# Altium PCB SMPSBreakout.PcbDoc
Units mm, origin at the board's own origin, x right, y up, seen from the top; angles counter-clockwise.
Board outline 60 x 60 mm, 2 copper layers (Top Layer, Bottom Layer); 56 components, 28 nets, 199 pads, 351 vias.
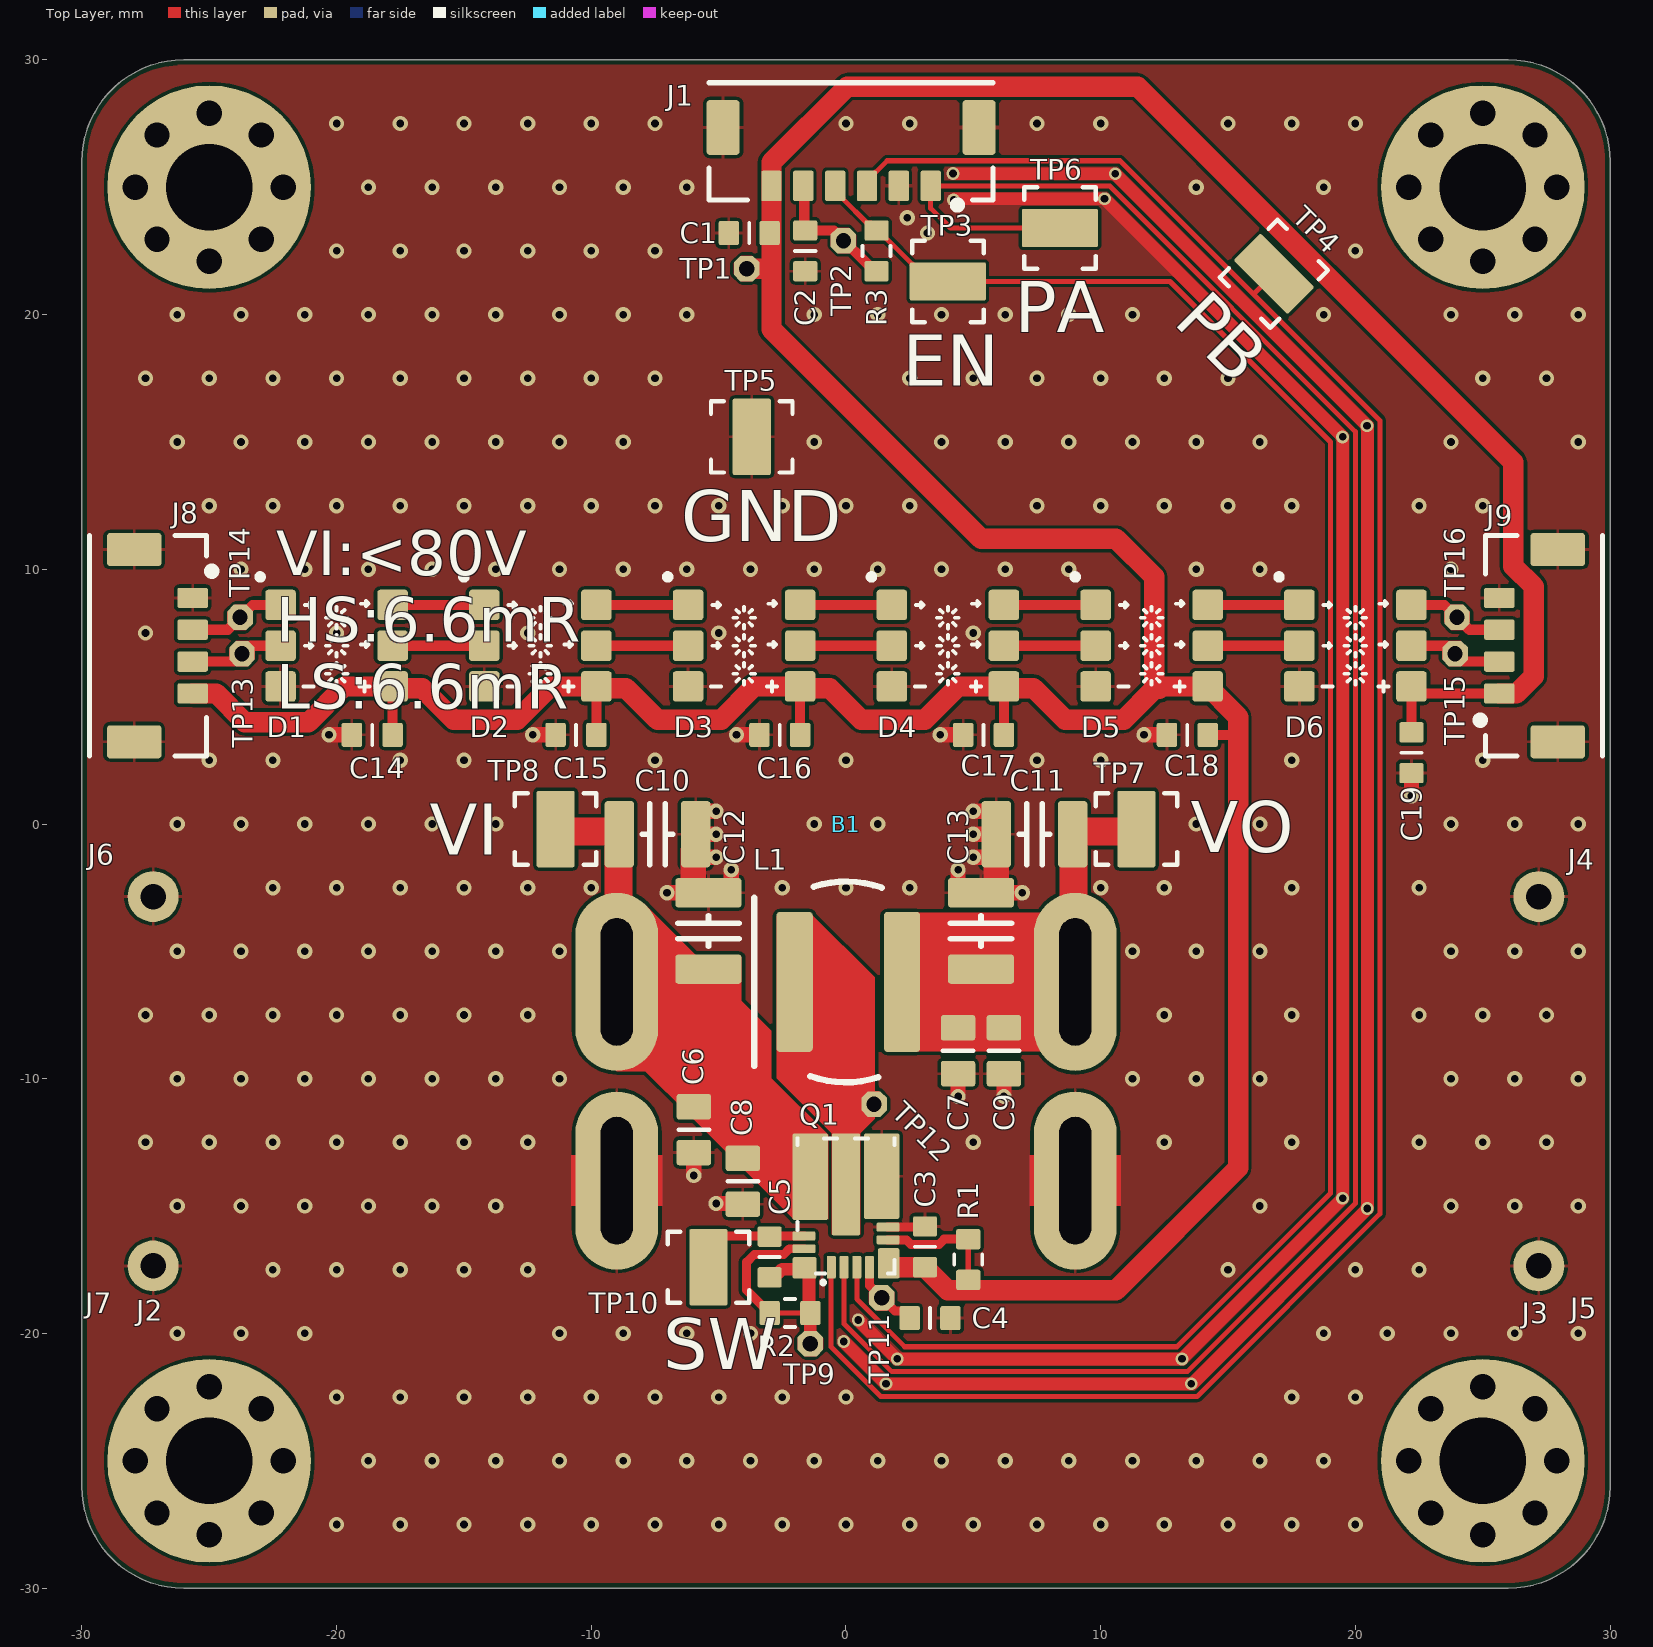
[diagram p0: Top Layer view]
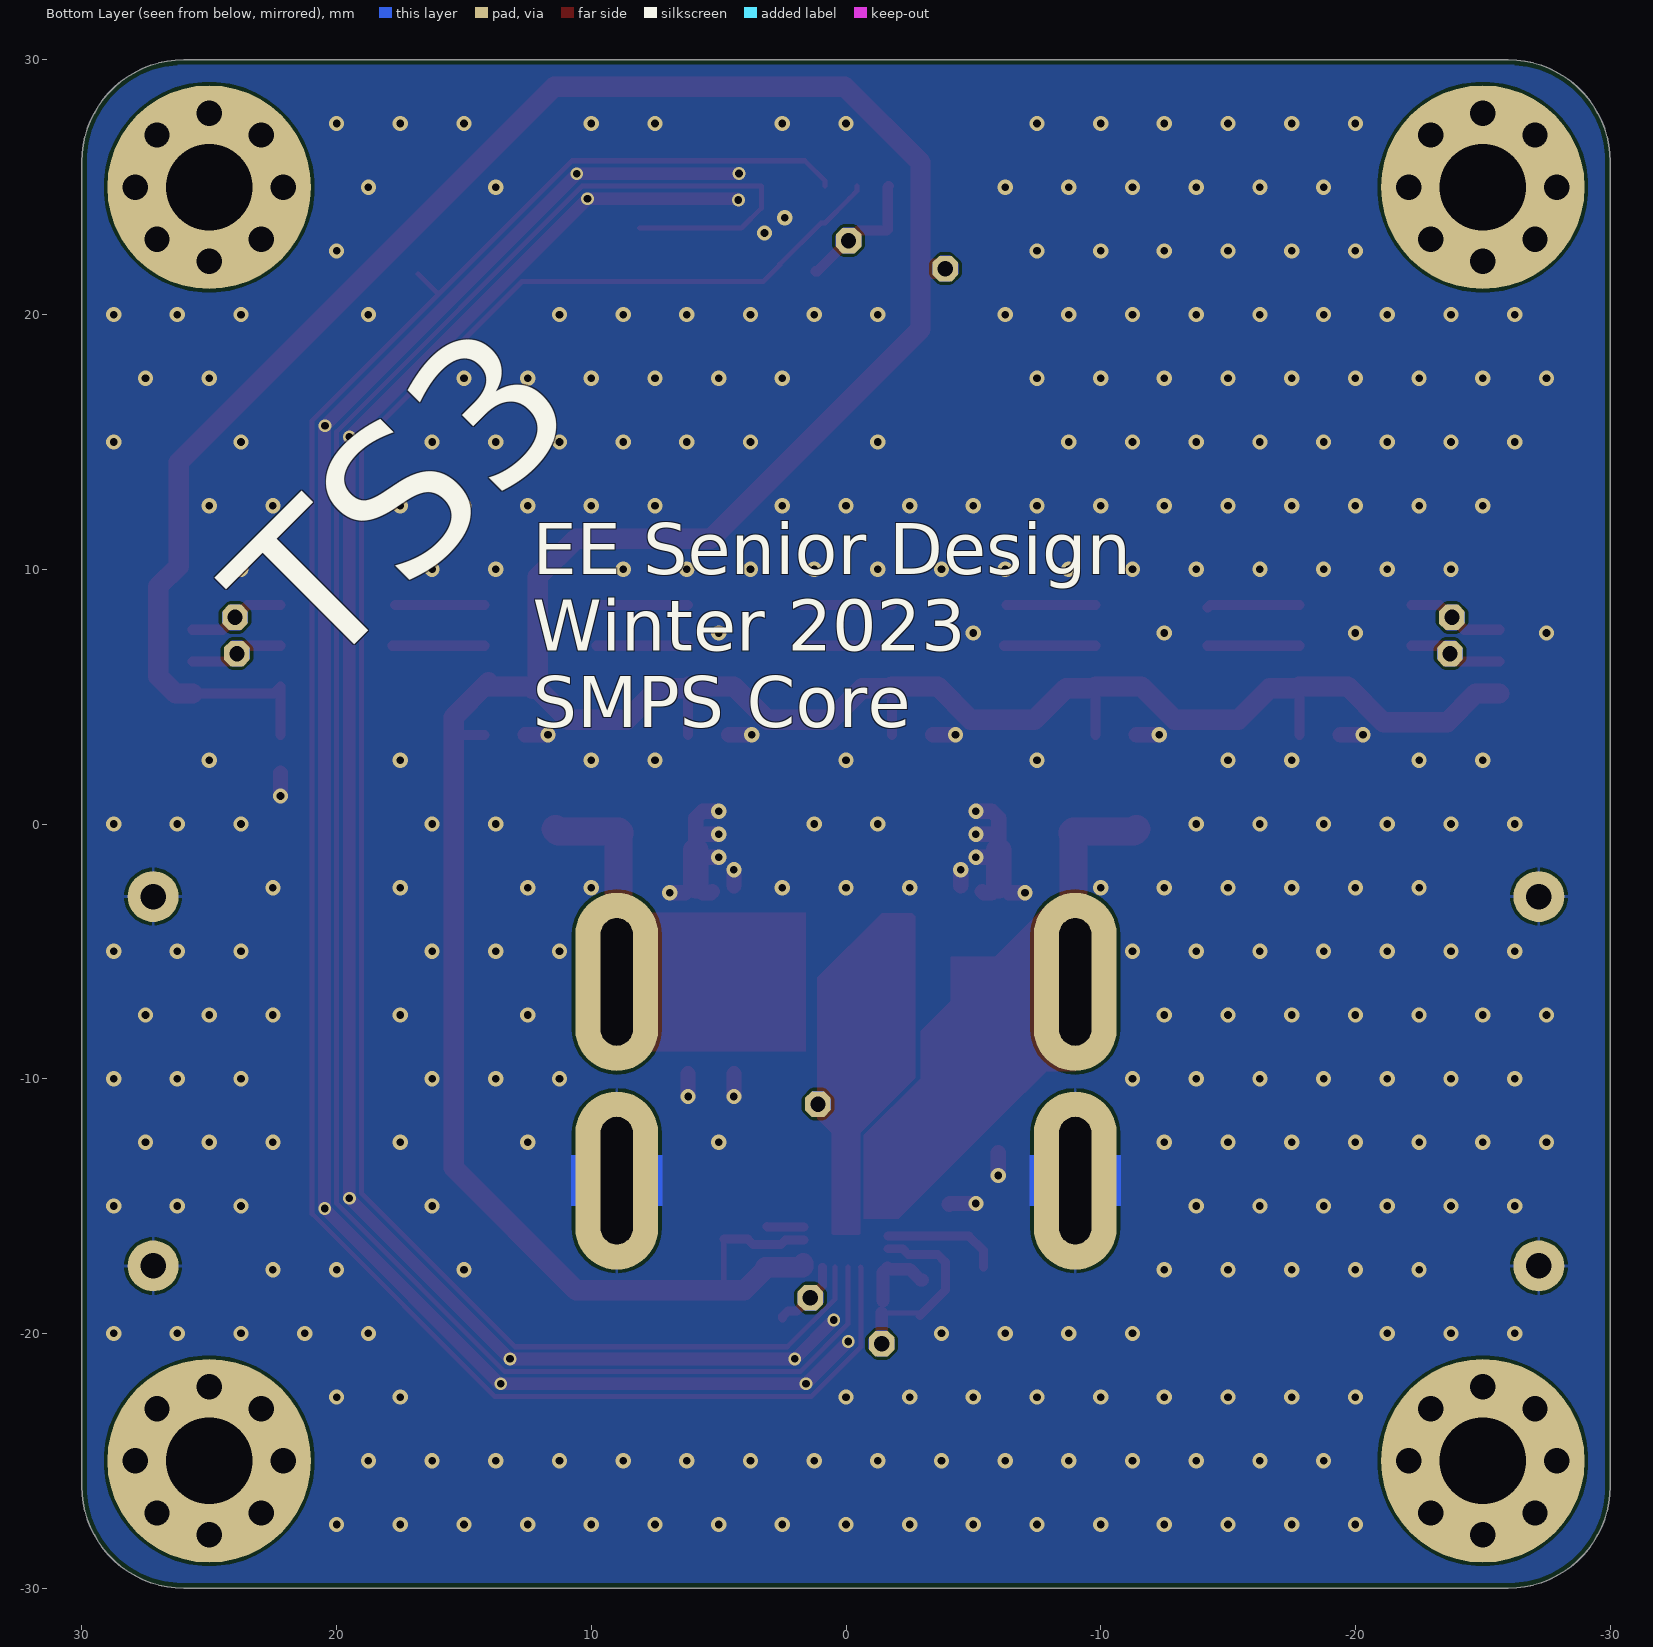
[diagram p1: Bottom Layer view, seen from below]
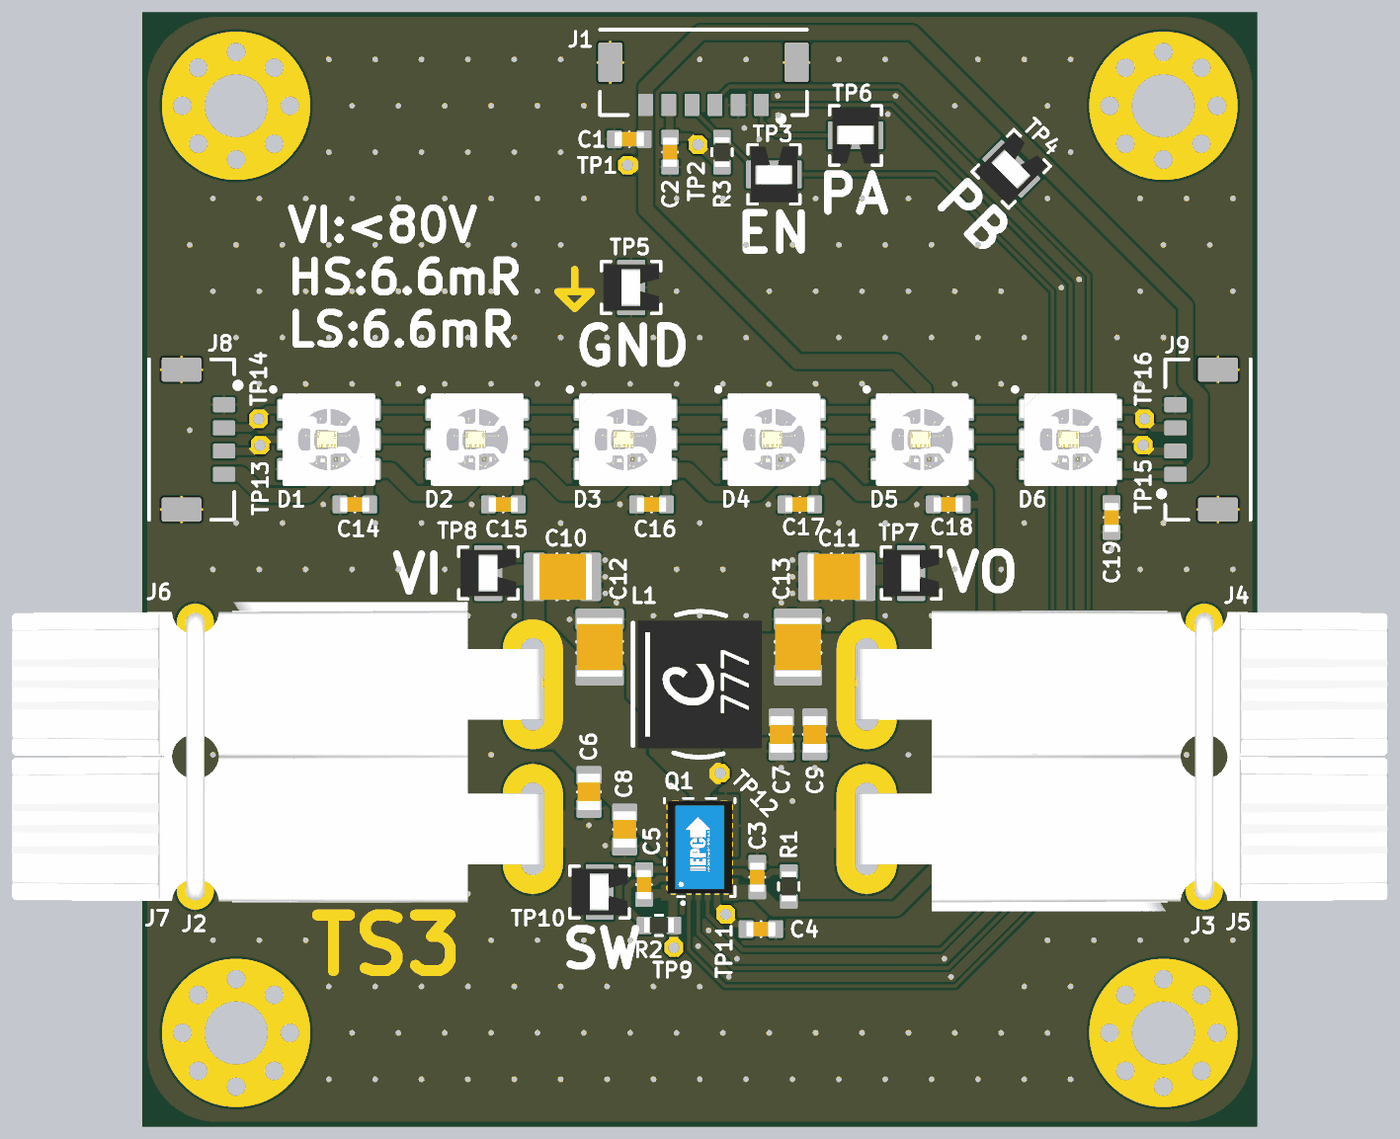
[diagram p2: 3D render of the assembled board from above, using the file's embedded part models]

## Layer stack, top to bottom
Top Solder: solder mask 0.0102, Solder Resist, Dk 3.5
Top Layer: signal copper 0.0356
Dielectric 1: dielectric 0.32, FR-4, Dk 4.8
Bottom Layer: signal copper 0.0356
Bottom Solder: solder mask 0.0102, Solder Resist, Dk 3.5

## Board outline
-26,-30 cw(c-26,-26) -30,-26 -30,26 cw(c-26,26) -26,30 26,30 cw(c26,26) 30,26 30,-26 cw(c26,-26) 26,-30

## Design rules (kind name [scope] priority, off if disabled: settings)
BoardOutlineClearance [All] p1: gap=0.2 ignorepadtopadclearanceinfootprint=FALSE
Clearance [All] p1: gap=0.127 ignorepadtopadclearanceinfootprint=FALSE except(0.25: Arc-Hole Track-Hole SMDPad-Hole THPad-Hole Via-Hole Fill-Hole Poly-Hole Region-Hole Text-Hole)
ComponentClearance [NOT InComponent('B1') vs NOT InComponent('B1')] p1: gap=0.127 collisioncheckmode=3 verticalgap=0.127 showdistances=TRUE
DiffPairsRouting [All] p1: maxlimit=0.254 minlimit=0.127 mostfreqgap=0.127 toplayer_minwidth=0.127 toplayer_maxwidth=25.4 toplayer_prefwidth=0.127 bottomlayer_minwidth=0.127 bottomlayer_maxwidth=25.4 bottomlayer_prefwidth=0.127 maxuncoupledlength=12.7
DiffPairsRouting DiffPairsRouting_USB [InDifferentialPair('USBD')] p2: maxlimit=0.2 minlimit=0.2 mostfreqgap=0.2 toplayer_minwidth=0.766 toplayer_maxwidth=0.766 toplayer_prefwidth=0.766 bottomlayer_minwidth=0.766 bottomlayer_maxwidth=0.766 bottomlayer_prefwidth=0.766 impedanceprofiledriven=TRUE impedanceprofileid={7DB69605-737D-4C2B-A8A7-E868D9FD1BFF} maxuncoupledlength=12.7
Height [All] p1: minheight=0 maxheight=1816.048 prefheight=12.7
HoleSize [All] p1: absolutevalues=TRUE maxlimit=6.3 minlimit=0.3 maxpercent=80.000 minpercent=20.000
HoleToHoleClearance [All] p1: gap=0.25 allowstackedmicrovias=FALSE
MinimumAnnularRing [All] p1: minimumring=0.15
MinimumSolderMaskSliver [All] p1: minsoldermaskwidth=0
PlaneClearance [All] p1: clearance=0.127
PlaneConnect PlaneConnectPowerPads [InPadClass('PowerPads')] p1: planeconnectstyle=Direct reliefexpansion=0.508 reliefentries=4 reliefconductorwidth=0.254 reliefairgap=0.254
PlaneConnect [All] p2: pad.planeconnectstyle=Relief pad.reliefexpansion=0.3 pad.reliefentries=4 pad.reliefconductorwidth=0.127 pad.reliefairgap=0.127 via.planeconnectstyle=Direct via.reliefexpansion=0.3 via.reliefentries=4 via.reliefconductorwidth=0.127 via.reliefairgap=0.127
PolygonConnect PolygonConnectPowerPads [All vs (InPadClass('PowerPads'))] p1: connectstyle=Direct reliefconductorwidth=0.254 reliefentries=4 polygonreliefangle="90 Angle" airgapwidth=0.254
PolygonConnect [All] p2: thpad.connectstyle=Relief thpad.reliefconductorwidth=0.127 thpad.reliefentries=4 thpad.polygonreliefangle="90 Angle" thpad.airgapwidth=0.127 smdpad.connectstyle=Relief smdpad.reliefconductorwidth=0.127 smdpad.reliefentries=4 smdpad.polygonreliefangle="90 Angle" smdpad.airgapwidth=0.127 via.connectstyle=Direct via.reliefconductorwidth=0.127 via.reliefentries=4 via.polygonreliefangle="90 Angle" via.airgapwidth=0.127
RoutingVias [All] p1: holewidth=0.3 width=0.5 viastyle="Through Hole" minholewidth=0.3 minwidth=0.5 maxholewidth=0.6 maxwidth=6.6
SilkToSilkClearance [All] p1: silktosilkclearance=0
SilkToSolderMaskClearance [IsPad] p1: minsilkscreentomaskgap=0.127 clearancetoexposedcopper=TRUE
SolderMaskExpansion SolderMaskExpansion_Via [IsVia] p1: expansion=0.075 istentingtop=TRUE
SolderMaskExpansion [NOT IsVia] p2: expansion=0.075 istentingtop=FALSE
Width [All] p1: maxlimit=25.4 minlimit=0.127 preferedwidth=0.127 minimp=50.000000 maximp=50.000000 favimp=50.000000
20 further rules are at their usual default settings.

## Components (designator, comment, footprint, x,y, rotation, side; value= is the part's Value field where it differs from the comment)
B1 "Board Outline Square" PCB_OUTLINE_SQUARE 0,0 r0 top locked
C1 "Capacitor - Ceramic - Generic" CAPACITOR_0603(1608)_GENERIC -3.8,23.2 r180 top value=1uF
C2 "Capacitor - Ceramic - Generic" CAPACITOR_0603(1608)_GENERIC -1.6,22.5 r270 top value=1uF
C3 "Capacitor - Ceramic - Generic" CAPACITOR_0603(1608)_GENERIC 3.1,-16.6 r90 top value=100nF
C4 "Capacitor - Ceramic - Generic" CAPACITOR_0603(1608)_GENERIC 3.3,-19.4 r180 top value=100nF
C5 "Capacitor - Ceramic - Generic" CAPACITOR_0603(1608)_GENERIC -3,-17 r270 top value=100nF
C6 "Capacitor - Ceramic - Generic" CAPACITOR_0805(2012)_GENERIC -5.975,-12 r270 top value=1uF
C7 "Capacitor - Ceramic - Generic" CAPACITOR_0805(2012)_GENERIC 4.4,-8.9 r270 top value=1uF
C8 "Capacitor - Ceramic - Generic" CAPACITOR_0805(2012)_GENERIC -4.05,-14.025 r270 top value=1uF
C9 "Capacitor - Ceramic - Generic" CAPACITOR_0805(2012)_GENERIC 6.2,-8.9 r270 top value=1uF
C10 "Capacitor - Ceramic - Generic" CAPACITOR_1210(3225)_GENERIC -7.4,-0.4 r0 top value=10uF
C11 "Capacitor - Ceramic - Generic" CAPACITOR_1210(3225)_GENERIC 7.4,-0.4 r180 top value=10uF
C12 "Capacitor - Ceramic - Generic" CAPACITOR_1210(3225)_GENERIC -5.4,-4.2 r90 top value=10uF
C13 "Capacitor - Ceramic - Generic" CAPACITOR_1210(3225)_GENERIC 5.3,-4.2 r90 top value=10uF
C14 "Capacitor - Ceramic - Generic" CAPACITOR_0603(1608)_GENERIC -18.6,3.5 r180 top value=100nF
C15 "Capacitor - Ceramic - Generic" CAPACITOR_0603(1608)_GENERIC -10.6,3.5 r180 top value=100nF
C16 "Capacitor - Ceramic - Generic" CAPACITOR_0603(1608)_GENERIC -2.6,3.5 r180 top value=100nF
C17 "Capacitor - Ceramic - Generic" CAPACITOR_0603(1608)_GENERIC 5.4,3.5 r180 top value=100nF
C18 "Capacitor - Ceramic - Generic" CAPACITOR_0603(1608)_GENERIC 13.4,3.5 r180 top value=100nF
C19 "Capacitor - Ceramic - Generic" CAPACITOR_0603(1608)_GENERIC 22.2,2.8 r270 top value=100nF
D1 "APA102C" 5X5MM(6PIN)_JLEAD_GENERIC -20,7 r0 top
D2 "APA102C" 5X5MM(6PIN)_JLEAD_GENERIC -12,7 r0 top
D3 "APA102C" 5X5MM(6PIN)_JLEAD_GENERIC -4,7 r0 top
D4 "APA102C" 5X5MM(6PIN)_JLEAD_GENERIC 4,7 r0 top
D5 "APA102C" 5X5MM(6PIN)_JLEAD_GENERIC 12,7 r0 top
D6 "APA102C" 5X5MM(6PIN)_JLEAD_GENERIC 20,7 r0 top
J1 "Connector - Header - 6P 2M - Generic" CONNECTOR_HEADER_MOLEX_5055670681 0.2,26.8 r0 top
J2 "PP45 Staple" CONNECTOR_ACCESSORY_PP45-STAPLE_ANDERSON -27.2,-10.1 r270 top locked
J3 "PP45 Staple" CONNECTOR_ACCESSORY_PP45-STAPLE_ANDERSON 27.2,-10.1 r90 top locked
J4 "PP45" CONNECTOR_BTOC_PP45_ANDERSON 9,-6.2 r90 top locked
J5 "PP45" CONNECTOR_BTOC_PP45_ANDERSON 9,-14 r90 top locked
J6 "PP45" CONNECTOR_BTOC_PP45_ANDERSON -9,-6.2 r270 top locked
J7 "PP45" CONNECTOR_BTOC_PP45_ANDERSON -9,-14 r270 top locked
J8 "Connector - Header - 4P 2M - Generic" CONNECTOR_HEADER_MOLEX_5055670481 -27.4,7 r90 top
J9 "Connector - Header - 4P 2M - Generic" CONNECTOR_HEADER_MOLEX_5055670481 27.4,7 r270 top
L1 "Inductor - Ferrite Core - Generic" XGL6060_COILCRAFT 0,-6.2 r90 top locked value=3.3uH
Q1 "EPC23102" QFN-13_EPC_EPC2310X 0,-15 r90 top locked
R1 "Resistor - Fixed - Jumper" RESISTOR_0603(1608)_NC_JUMPER 4.8,-17.1 r90 top net-tie value=0R
R2 "Resistor - Fixed - Jumper" RESISTOR_0603(1608)_NC_JUMPER -2.2,-19.2 r0 top net-tie value=0R
R3 "Resistor - Fixed - Generic" RESISTOR_0603(1608)_GENERIC 1.2,22.5 r90 top value=10kR
TP1 "Test Point - THT" TESTPOINT_THT_OCTAGON -3.9,21.8 r90 top
TP2 "Test Point - THT" TESTPOINT_THT_OCTAGON -0.1,22.9 r90 top
TP3 "519XTR" TESTPOINT_LOOP_SMD_KEYSTONE_519X 4,21.3 r180 top
TP4 "519XTR" TESTPOINT_LOOP_SMD_KEYSTONE_519X 16.8,21.6 r135 top
TP5 "519XTR" TESTPOINT_LOOP_SMD_KEYSTONE_519X -3.7,15.2 r90 top
TP6 "519XTR" TESTPOINT_LOOP_SMD_KEYSTONE_519X 8.4,23.4 r0 top
TP7 "519XTR" TESTPOINT_LOOP_SMD_KEYSTONE_519X 11.4,-0.2 r90 top
TP8 "519XTR" TESTPOINT_LOOP_SMD_KEYSTONE_519X -11.4,-0.2 r90 top
TP9 "Test Point - THT" TESTPOINT_THT_OCTAGON -1.4,-20.4 r90 top
TP10 "519XTR" TESTPOINT_LOOP_SMD_KEYSTONE_519X -5.4,-17.4 r90 top
TP11 "Test Point - THT" TESTPOINT_THT_OCTAGON 1.4,-18.6 r90 top
TP12 "Test Point - THT" TESTPOINT_THT_OCTAGON 1.1,-11 r90 top
TP13 "Test Point - THT" TESTPOINT_THT_OCTAGON -23.712,6.688 r90 top
TP14 "Test Point - THT" TESTPOINT_THT_OCTAGON -23.787,8.113 r90 top
TP15 "Test Point - THT" TESTPOINT_THT_OCTAGON 23.913,6.688 r90 top
TP16 "Test Point - THT" TESTPOINT_THT_OCTAGON 23.988,8.113 r90 top

## Footprints (in the part's own frame and the unit in brackets; to place one, negate y for a bottom-side part, rotate by r counter-clockwise, add the part's x,y. Pads: shape width x height; smd on the part's side, far side on the other; paste and mask are expansions set on the pad)
5X5MM(6PIN)_JLEAD_GENERIC [mm]
  rrect20% 1.2x1.2 smd: 1(-2.2,1.6) 2(-2.2,0) 3(-2.2,-1.6) 4(2.2,-1.6) 5(2.2,0) 6(2.2,1.6)
  silkscreen extent -3.1,-1.8 1.3,2.8, body extent -2.75,-2.5 2.75,2.5, height 1.55
CAPACITOR_0603(1608)_GENERIC [mm]
  rrect20% 0.8x0.95 smd: 1(-0.8,0) 2(0.8,0)
  silkscreen extent 0,-0.4 0,0.4, body extent -0.8,-0.4 0.8,0.4, height 0.9
CAPACITOR_0805(2012)_GENERIC [mm]
  rrect20% 1x1.35 smd: 1(-0.9,0) 2(0.9,0)
  silkscreen extent 0,-0.6 0,0.6, body extent -1,-0.63 1,0.63, height 1.35
CAPACITOR_1210(3225)_GENERIC [mm]
  rrect20% 1.15x2.6 smd: 1(-1.5,0) 2(1.5,0)
  silkscreen extent -0.6,-1.2 0.6,1.2, body extent -1.6,-1.25 1.6,1.25, height 2
CONNECTOR_ACCESSORY_PP45-STAPLE_ANDERSON [mm]
  round 2 hole 1: 1(-7.25,0) 1(7.25,0)
  oval 7x3.25 on Mech16: ""(-4,18.2) ""(3.9,18.2)
  body extent -7.75,-0.5 7.75,0.5, height 9.4
CONNECTOR_BTOC_PP45_ANDERSON [mm]
  oval 7x3.25 hole 1.25 slot 5 at 0 deg: 1(0,0)
  oval 7x3.25 on Mech16: ""(-7.9,0) ""(0,7.92) ""(7.9,0)
  body extent -4.45,-28.1 3.96,0.52, height 8.39
CONNECTOR_HEADER_MOLEX_5055670481 [mm]
  rrect20% 0.8x1.2 smd: 1(1.875,-1.75) 2(0.625,-1.75) 3(-0.625,-1.75) 4(-1.875,-1.75)
  rrect20% 1.3x2.15 smd mask+0.076: M1(3.775,0.545) M2(-3.775,0.545)
  silkscreen extent -4.33,-2.65 4.33,2.3
CONNECTOR_HEADER_MOLEX_5055670681 [mm]
  rrect20% 0.8x1.2 smd: 1(3.125,-1.75) 2(1.875,-1.75) 3(0.625,-1.75) 4(-0.625,-1.75) 5(-1.875,-1.75) 6(-3.125,-1.75)
  rrect20% 1.3x2.15 smd mask+0.076: M1(5.025,0.545) M2(-5.025,0.545)
  silkscreen extent -5.58,-2.65 5.58,2.3
PCB_OUTLINE_SQUARE [mm]
  round 8 hole 3.4: 1(-25,-25) 1(-25,25) 1(25,-25) 1(25,25)
QFN-13_EPC_EPC2310X [mm]
  rrect30% 0.9x0.35 smd paste-1 mask-1: 1(-2.401,0.576) 2(-2.401,0.076) 3(-2.401,-0.424) 4(-2.401,-0.924)
  rrect20% 1.2x0.85 smd paste-1 mask-1: 5(-2.251,-1.674)
  rrect30% 0.35x0.9 smd paste-1 mask-1: 6(-1.326,-1.649) 7(-0.826,-1.649) 11(-1.176,1.651) 12(-1.676,1.651)
  rrect10% 3.35x1.395 smd paste-1 mask-1: 8(1.174,-1.401)
  rrect10% 4x1.1 smd paste-1 mask-1: 9(0.849,0.002)
  rrect10% 3.4x1.395 smd paste-1 mask-1: 10(1.149,1.403)
  rrect20% 0.85x0.95 smd paste-1 mask-1: 13(-2.426,1.626)
  rrect50% 0.52x0.3 on Top Solder paste-1 mask-1: ""(-2.303,-0.924) ""(-2.303,-0.424) ""(-2.303,0.076) ""(-2.303,0.576)
  rrect50% 0.4x0.25 on Top Paste paste-1 mask-1: ""(-2.301,-0.424) ""(-2.301,0.576) ""(-2.301,-0.924) ""(-2.301,0.076)
  rrect50% 0.535x0.3 on Top Solder paste-1 mask-1: ""(-2.301,1.426)
  rrect50% 0.45x0.375 on Top Paste paste-1 mask-1: ""(-2.256,1.471)
  rrect50% 0.3x0.535 on Top Solder paste-1 mask-1: ""(-2.176,1.544)
  rrect50% 0.888x0.3 on Top Solder paste-1 mask-1: ""(-2.12,-1.424)
  rrect50% 0.795x0.3 on Top Paste paste-1 mask-1: ""(-2.083,-1.448)
  rrect50% 0.3x0.52 on Top Solder paste-1 mask-1: ""(-1.826,-1.549) ""(-1.676,1.551) ""(-1.326,-1.549) ""(-1.176,1.551) ""(-0.826,-1.549) ""(-0.326,1.551) ""(-0.326,-1.549) ""(0.174,1.551) ""(0.174,-1.549) ""(0.674,1.551) ""(0.674,-1.549) ""(1.174,1.551) ""(1.174,-1.549) ""(1.674,-1.549) ""(1.674,1.551) ""(2.174,-1.549) ""(2.174,1.551)
  rrect50% 0.25x0.4 on Top Paste paste-1 mask-1: ""(-1.676,1.551) ""(-1.326,-1.549) ""(-1.176,1.551) ""(-0.826,-1.549)
  rrect50% 3.405x0.48 on Top Solder paste-1 mask-1: ""(0.809,0.002)
  rrect50% 3.355x0.43 on Top Paste paste-1 mask-1: ""(0.821,0.001)
  rrect50% 3x0.59 on Top Solder paste-1 mask-1: ""(1.023,-1.309) ""(1.023,1.311)
  rrect50% 2.95x0.6 on Top Paste paste-1 mask-1: ""(1.034,-1.374) ""(1.034,1.376)
  silkscreen extent -3.05,-1.9 2.65,1.9, body extent -2.5,-1.75 2.5,1.75, height 0.56
RESISTOR_0603(1608)_GENERIC [mm]
  rrect20% 0.8x0.95 smd: 1(-0.8,0) 2(0.8,0)
  silkscreen extent -0.2,-0.55 0.2,0.55, body extent -0.8,-0.4 0.8,0.4, height 0.55
RESISTOR_0603(1608)_NC_JUMPER [mm]
  rrect20% 0.8x0.95 smd: 1(-0.8,0) 2(0.8,0)
  Top Layer lines w0.2: -0.8,0 0.8,0
  silkscreen extent -0.2,-0.55 0.2,0.55, body extent -0.8,-0.4 0.8,0.4, height 0.55
TESTPOINT_LOOP_SMD_KEYSTONE_519X [mm]
  rrect10% 3x1.5 smd: 1(0,0)
  silkscreen extent -1.4,-1.6 1.4,1.6, body extent -1.25,-1.5 1.25,1.5, height 2.49
TESTPOINT_THT_OCTAGON [mm]
  oct 1x1 hole 0.6: 1(0,0)
  Top Layer region: -0.2,-0.5 -0.5,-0.2 -0.5,0.2 -0.2,0.5 0.2,0.5 0.5,0.2 0.5,-0.2 0.2,-0.5
  Bottom Layer region: -0.2,-0.5 -0.5,-0.2 -0.5,0.2 -0.2,0.5 0.2,0.5 0.5,0.2 0.5,-0.2 0.2,-0.5
XGL6060_COILCRAFT [mm]
  rrect20% 5.5x1.43 smd: 1(0,2.02) 2(0,-2.2)
  silkscreen extent -3.94,-1.4 3.94,3.6, body extent -3.45,-3.35 3.45,3.35, height 6

## Part data
B1: library part Board_Outline_Square
C1 C2: library part CAP-CER_1UF_25V_20%_X7R_0603(1608), "1uF ±20% 25V Ceramic Capacitor X7R 0603(1608 Metric)", Manufacturer 1="Murata Electronics", Manufacturer Lifecycle 1=Active, Manufacturer Part Number 1=GCM188R71E105KA64D, Manufacturer Part Number 2=GCM188R71E105KA64J, Manufacturer Part Number 3=GCM188R71E105MA64D, Package/Case Imperial=0603, Package/Case Metric=1608, Temperature Coefficient=X7R, Tolerance=20%, Voltage - Rated=25V, Full Item="Ceramic Capacitor", Item=CAP-CER, Manufacturer 2="Murata Electronics", Manufacturer 3="Murata Electronics", Manufacturer Lifecycle 2=Active, Manufacturer Lifecycle 3=Active, Mounting Type=SMT, Name=CAP-CER_1UF_25V_20%_X7R_0603(1608)
C3 C4 C5 C14 C15 C16 C17 C18 C19: library part CAP-CER_100NF_100V_20%_X7R_0603(1608), "100nF ±20% 100V Ceramic Capacitor X7R 0603(1608 Metric)", Manufacturer 1="Murata Electronics", Manufacturer Lifecycle 1=Active, Manufacturer Part Number 1=GRM188R72A104KA35D, Manufacturer Part Number 2=GRM188R72A104KA35J, Manufacturer Part Number 3=GRM188R72A104MA35D, Package/Case Imperial=0603, Package/Case Metric=1608, Temperature Coefficient=X7R, Tolerance=20%, Voltage - Rated=100V, Full Item="Ceramic Capacitor", Item=CAP-CER, Manufacturer 2="Murata Electronics", Manufacturer 3="Murata Electronics", Manufacturer Lifecycle 2=Active, Manufacturer Lifecycle 3=Active, Mounting Type=SMT, Name=CAP-CER_100NF_100V_20%_X7R_0603(1608)
C6 C7 C8 C9: library part CAP-CER_1UF_100V_10%_X7S_0805(2012), "1uF ±10% 100V Ceramic Capacitor X7S 0805(2012 Metric)", Manufacturer 1="Murata Electronics", Manufacturer Lifecycle 1=Active, Manufacturer Part Number 1=GRM21BC72A105KE01L, Manufacturer Part Number 2=GRJ21BC72A105KE11L, Manufacturer Part Number 3=GRM21BC72A105KE01K, Package/Case Imperial=0805, Package/Case Metric=2012, Temperature Coefficient=X7S, Tolerance=10%, Voltage - Rated=100V, Full Item="Ceramic Capacitor", Item=CAP-CER, Manufacturer 2="Murata Electronics", Manufacturer 3="Murata Electronics", Manufacturer Lifecycle 2=Active, Manufacturer Lifecycle 3=Active, Mounting Type=SMT, Name=CAP-CER_1UF_100V_10%_X7S_0805(2012)
C10 C11 C12 C13: library part CAP-CER_10UF_100V_20%_X7S_1210(3225), "10uF ±20% 100V Ceramic Capacitor X7S 1210(3225 Metric)", Manufacturer 1="Murata Electronics", Manufacturer Lifecycle 1=Active, Manufacturer Part Number 1=GRM32EC72A106ME05L, Manufacturer Part Number 2=GRM32EC72A106KE05L, Manufacturer Part Number 3=GRM32EC72A106KE05K, Package/Case Imperial=1210, Package/Case Metric=3225, Temperature Coefficient=X7S, Tolerance=20%, Voltage - Rated=100V, Full Item="Ceramic Capacitor", Item=CAP-CER, Manufacturer 2="Murata Electronics", Manufacturer 3="Murata Electronics", Manufacturer Lifecycle 2=Active, Manufacturer Lifecycle 3=Active, Mounting Type=SMT, Name=CAP-CER_10UF_100V_20%_X7S_1210(3225)
D1 D2 D3 D4 D5 D6: library part "Diode - LED - Addressable - 5x5mm APA102C", Supplier Part Number 1=1568-COM-16345-ND, Supplier 1=Digi-Key, Supplier 2=Mouser, Supplier Part Number 2=474-COM-16345
J1: library part CON_HDR_6P_1.25MM-PITCH_50V_2.4A_SMT_MOLEX_5055670681, "Connector Header 6 Pin 1.25mm Pitch Mating 50V 2.4A Rated 8 Walls Shrouded SMT Molex 5055670681", Current - Max=2.4A, Manufacturer 1=Molex, Manufacturer Lifecycle 1=Active, Manufacturer Part Number 1=5055670681, Voltage - Max=50V, Fastening Type="Locking Ramp", Full Item="Connector Header", Item=CON_HDR, Mounting Type=SMT, Name=CON_HDR_6P_1.25MM-PITCH_50V_2.4A_SMT_MOLEX_5055670681, Number of Positions=6, Pitch - Mating=1.25mm, Shrouding="8 Walls"
J2 J3: library part "Connector - Accessory - Mechanical Support - Anderson PP45 Staple"
J4 J5 J6 J7: library part "Connector - Modular - 1P - Anderson PP45"
J8 J9: library part CON_HDR_4P_1.25MM-PITCH_50V_2.4A_SMT_MOLEX_5055670481, "Connector Header 4 Pin 1.25mm Pitch Mating 50V 2.4A Rated 6 Walls Shrouded SMT Molex 5055670481", Current - Max=2.4A, Manufacturer 1=Molex, Manufacturer Lifecycle 1=Active, Manufacturer Part Number 1=5055670481, Voltage - Max=50V, Fastening Type="Locking Ramp", Full Item="Connector Header", Item=CON_HDR, Mounting Type=SMT, Name=CON_HDR_4P_1.25MM-PITCH_50V_2.4A_SMT_MOLEX_5055670481, Number of Positions=4, Pitch - Mating=1.25mm, Shrouding="6 Walls"
L1: library part IND-FXD_3.3UH_20%_5.9MR_13.4A_NONSTANDARD, "Fixed Inductor 3.3uH 20% 5.9mR 12.1A Rated 13.4A Saturation Nonstandard 6.71mmx6.71mm", Current - Rating=12.1A, Current - Saturation=13.4A, Manufacturer 1=Coilcraft, Manufacturer Lifecycle 1=Active, Manufacturer Part Number 1=XGL6060-332MEC, Package/Case Manufacturer=6.71mmx6.71mm, Package/Case Standard=Nonstandard, Tolerance=20%, DCR=5.9mR, Full Item="Fixed Inductor", Item=IND-FXD, Mounting Type=SMT, Name=IND-FXD_3.3UH_20%_5.9MR_13.4A_NONSTANDARD, Type=Molded
Q1: library part "MOSFET - GaN - Integrated Driver EPC 23102", Supplier Part Number 1=917-EPC23102ENGRTCT-ND, Supplier 1=Digi-Key, Supplier 2=Digi-Key, Supplier Part Number 2=917-EPC23102ENGRTDKR-ND
R1 R2: library part RES-JMP_0R_1%_100MW_100PPM/°C_0603(1608), "0R ±1% 100mW Chip Resistor with Jumper 100ppm/°C 0603(1608 Metric)", Package/Case Imperial=0603, Package/Case Metric=1608, Power=100mW, Temperature Coefficient=100ppm/°C, Tolerance=1%, Full Item="Chip Resistor with Jumper", Item=RES-JMP, Mounting Type=SMT, Name=RES-JMP_0R_1%_100MW_100PPM/°C_0603(1608)
R3: library part RES-FXD_10KR_1%_100MW_100PPM/°C_0603(1608), "10kR ±1% 100mW Chip Resistor 100ppm/°C 0603(1608 Metric)", Manufacturer 1="Bourns Inc.", Manufacturer Lifecycle 1=Active, Manufacturer Part Number 1=CR0603-FX-1002ELF, Manufacturer Part Number 2=CR0603AFX-1002EAS, Manufacturer Part Number 3=CMP0603-FX-1002ELF, Package/Case Imperial=0603, Package/Case Metric=1608, Power=100mW, Temperature Coefficient=100ppm/°C, Tolerance=1%, Full Item="Chip Resistor", Item=RES-FXD, Manufacturer 2="Bourns Inc.", Manufacturer 3="Bourns Inc.", Manufacturer Lifecycle 2=Active, Manufacturer Lifecycle 3=Active, Mounting Type=SMT, Name=RES-FXD_10KR_1%_100MW_100PPM/°C_0603(1608)
TP3 TP4 TP5 TP6 TP7 TP8 TP10: library part "Test Point - SMT - Loop - Keystone 519X"

## Via types
v1: diameter 0.6, hole 0.3, Top Layer to Bottom Layer, tented both sides, 305 vias
v2: diameter 1.4, hole 1, Top Layer to Bottom Layer, tented both sides, 32 vias
v3: diameter 0.5, hole 0.3, Top Layer to Bottom Layer, tented both sides, 14 vias

## Nets (pads, with @x,y where several pads share a name; then routed paths per layer and width w, separated by ;. In a path a pad name is that pad's centre, name@x,y a point inside that pad or via, vN(x,y) a via of type N, cw(c..) or ccw(c..) an arc to the next point about the centre after c; other vN are vias at no path point)
3V3: C2.1 J1.5 R3.1 TP2.1 | length 5.2
  Top Layer w0.4: J1.5 -1.637,25.013 C2.1@-1.637,23.338 ; C2.1 -0.475,23.3 1.125,21.7 R3.1
5V: C1.1 C3.1 C14.1 C15.1 C16.1 C17.1 C18.1 C19.1 D1.4 D2.4 D3.4 D4.4 D5.4 D6.4 J1.6 J8.4 J9.1 Q1.5 R1.1 TP1.1 | length 173.2
  Top Layer w0.4: C14.1 D1.4 ; C15.1 D2.4 ; C16.1 D3.4 ; C17.1 D4.4 ; C18.1 15.4,3.5 ; C19.1@22.2,3.5 D6.4 22.475,5.125 J9.1
  Top Layer w0.8: J8.4 -24.725,5.125 -23.6,4 -21.1,4 -19.7,5.4 D1.4 -17.737,5.337 -16.637,5.337 -15.4,4.1 -12.9,4.1 -11.6,5.4 D2.4 -9.737,5.337 -8.637,5.337 -7.4,4.1 -4.9,4.1 -3.6,5.4 D3.4 -1.737,5.337 -0.637,5.337 0.6,4.1 3.1,4.1 4.4,5.4 D4.4 6.263,5.337 7.363,5.337 8.6,4.1 10.9,4.1 12.1,5.3 ; TP1.1 -2.925,21.8 ; Q1.5 1.674,-17.375 1.699,-17.4 C3.1@3.175,-17.4 ; C3.1 C3.1@3.175,-17.4 ; D5.4@14.037,5.563 15.4,4.2 15.4,3.5 15.4,-13.5 10.6,-18.3 4,-18.3 3.175,-17.475 C3.1@3.175,-17.4 ; D5.4 12.4,5.4 12.3,5.3 12.1,5.3 ; J9.1 26.325,5.125 27,5.8 27,9.326 26.2,10.126 26.2,14.2 11.453,28.947 0.047,28.947 -2.925,25.975 -2.925,23.2 -2.925,21.8 ; -2.925,21.8 -2.925,19.425 5.3,11.2 10.6,11.2 12.1,9.7 12.1,5.3
CKI: D1.2 J8.3 TP13.1 | length 3.7
  Top Layer w0.4: J8.3 -24.025,6.375 -23.4,7 D1.2
CKIO: D3.5 D4.2 | length 3.6
  Top Layer w0.4: D3.5 D4.2
CKO: D6.5 J9.2 TP15.1 | length 3.7
  Top Layer w0.4: D6.5 23.6,7 24.225,6.375 J9.2
GND: C1.2 C2.2 C3.2 C4.1 C6.2 C7.2 C8.2 C9.2 C10.2 C11.2 C12.2 C13.2 C14.2 C15.2 C16.2 C17.2 C18.2 C19.2 D1.3 D2.3 D3.3 D4.3 D5.3 D6.3 J1.2 J1.M1 J1.M2 J2.1 J3.1 J5.1 J7.1 J8.1 J8.M1 J8.M2 J9.4 J9.M1 J9.M2 Q1.7 Q1.8 TP5.1 | length 172.4
  Top Layer w0.35: Q1.7 3.074,-15.826 C3.2
  Top Layer w0.5: v3(-0.087,-20.32) v3(1.57,-21.977) 13.598,-21.977 20.46,-15.115 v3(20.46,-15.097) 20.477,-15.08 v3@20.477,15.616 ; v3(0.479,-19.471) v3(2.007,-21) v3(13.193,-21) v3(19.496,-14.696) ; v3@4.2,25.527 v3(10.566,25.527) v3@20.477,15.616 ; v3(4.225,24.5) 4.271,24.546 v3(10.146,24.546) v3@19.5,15.193 ; v3(19.496,15.196) v3@19.5,15.193 ; v3@19.5,-14.693 v3@19.5,15.193 ; v3(20.454,15.639) v3@20.477,15.616
  Top Layer w0.6: v1(-20.3,3.5) C14.2 ; v1(-12.3,3.5) C15.2 ; v1(-7.025,-2.7) C12.2@-6.4,-2.7 ; C12.2@-6,-2.425 -5.725,-2.7 C12.2 C12.2@-5.35,-2.65 ; v1(-5.975,-13.8) C6.2 ; v1(-5.1,-14.9) -4.075,-14.9 C8.2 ; v1(-5.1,-1.3) -5.725,-1.3 -6,-1.025 C10.2@-6,-0.4 ; v1(-5.1,-0.4) C10.2@-6,-0.4 ; v1(-5.1,0.5) -5.725,0.5 -6,0.225 C10.2@-6,-0.4 ; C12.2@-4.5,-2.425 v1(-4.5,-1.8) ; v1(-4.3,3.5) C16.2 ; v1(3.7,3.5) C17.2 ; v1(4.4,-10.7) C7.2 ; C13.2@4.4,-2.425 v1(4.4,-1.8) ; v1(5,-1.3) 5.625,-1.3 5.9,-1.025 C11.2 ; v1(5,-0.4) C11.2 ; v1(5,0.5) 5.625,0.5 5.9,0.225 C11.2 ; C13.2@5.25,-2.65 C13.2 5.625,-2.7 C13.2@5.9,-2.425 ; v1(6.2,-10.7) C9.2 ; C13.2@6.3,-2.7 v1(6.925,-2.7) ; v1(11.7,3.5) C18.2 ; v1(22.2,1.1) C19.2
  Top Layer w1: C12.2@-6,-2.425 C10.2@-6,-1.025 ; C13.2@5.9,-2.425 C11.2@5.9,-1.025
  other v1: -20,-27.5 -17.5,-27.5 -15,-27.5 -12.5,-27.5 -10,-27.5 -7.5,-27.5 -5,-27.5 -2.5,-27.5 0,-27.5 2.5,-27.5 5,-27.5 7.5,-27.5 10,-27.5 12.5,-27.5 15,-27.5 17.5,-27.5 20,-27.5 -18.75,-25 -16.25,-25 -13.75,-25 -11.25,-25 -8.75,-25 -6.25,-25 -3.75,-25 -1.25,-25 1.25,-25 3.75,-25 6.25,-25 8.75,-25 11.25,-25 13.75,-25 16.25,-25 18.75,-25 -20,-22.5 -17.5,-22.5 -15,-22.5 -12.5,-22.5 -10,-22.5 -7.5,-22.5 -5,-22.5 -2.5,-22.5 0,-22.5 17.5,-22.5 20,-22.5 -26.25,-20 -23.75,-20 -21.25,-20 -11.25,-20 -8.75,-20 -6.25,-20 -3.75,-20 18.75,-20 21.25,-20 23.75,-20 26.25,-20 28.75,-20 -22.5,-17.5 -20,-17.5 -17.5,-17.5 -15,-17.5 -12.5,-17.5 15,-17.5 20,-17.5 22.5,-17.5 -26.25,-15 -23.75,-15 -21.25,-15 -18.75,-15 -16.25,-15 -13.75,-15 16.25,-15 23.75,-15 26.25,-15 28.75,-15 -27.5,-12.5 -25,-12.5 -22.5,-12.5 -20,-12.5 -17.5,-12.5 -15,-12.5 -12.5,-12.5 5,-12.5 12.5,-12.5 17.5,-12.5 22.5,-12.5 25,-12.5 27.5,-12.5 -26.25,-10 -23.75,-10 -21.25,-10 -18.75,-10 -16.25,-10 -13.75,-10 -11.25,-10 11.25,-10 13.75,-10 16.25,-10 23.75,-10 26.25,-10 28.75,-10 -27.5,-7.5 -25,-7.5 -22.5,-7.5 -20,-7.5 -17.5,-7.5 -15,-7.5 -12.5,-7.5 12.5,-7.5 17.5,-7.5 22.5,-7.5 25,-7.5 27.5,-7.5 -26.25,-5 -23.75,-5 -21.25,-5 -18.75,-5 -16.25,-5 -13.75,-5 -11.25,-5 11.25,-5 13.75,-5 16.25,-5 23.75,-5 26.25,-5 28.75,-5 -22.5,-2.5 -20,-2.5 -17.5,-2.5 -15,-2.5 -12.5,-2.5 -10,-2.5 -2.5,-2.5 0,-2.5 2.5,-2.5 10,-2.5 12.5,-2.5 17.5,-2.5 22.5,-2.5 -26.25,0 -23.75,0 -21.25,0 -18.75,0 -16.25,0 -13.75,0 -1.25,0 1.25,0 13.75,0 16.25,0 23.75,0 26.25,0 28.75,0 -25,2.5 -22.5,2.5 -17.5,2.5 -15,2.5 -7.5,2.5 0,2.5 7.5,2.5 10,2.5 17.5,2.5 25,2.5 -27.5,7.5 -20,7.5 -12.5,7.5 -5,7.5 5,7.5 -23.75,10 -21.25,10 -18.75,10 -16.25,10 -13.75,10 -11.25,10 -8.75,10 -6.25,10 -3.75,10 -1.25,10 1.25,10 3.75,10 6.25,10 8.75,10 13.75,10 16.25,10 23.75,10 -25,12.5 -22.5,12.5 -20,12.5 -17.5,12.5 -15,12.5 -12.5,12.5 -10,12.5 -7.5,12.5 -5,12.5 -2.5,12.5 0,12.5 2.5,12.5 7.5,12.5 10,12.5 12.5,12.5 15,12.5 17.5,12.5 22.5,12.5 25,12.5 -26.25,15 -23.75,15 -21.25,15 -18.75,15 -16.25,15 -13.75,15 -11.25,15 -8.75,15 -1.25,15 3.75,15 6.25,15 8.75,15 11.25,15 13.75,15 16.25,15 23.75,15 28.75,15 -27.5,17.5 -25,17.5 -22.5,17.5 -20,17.5 -17.5,17.5 -15,17.5 -12.5,17.5 -10,17.5 -7.5,17.5 2.5,17.5 5,17.5 7.5,17.5 10,17.5 12.5,17.5 15,17.5 25,17.5 27.5,17.5 -26.25,20 -23.75,20 -21.25,20 -18.75,20 -16.25,20 -13.75,20 -11.25,20 -8.75,20 -6.25,20 -1.25,20 1.25,20 3.75,20 6.25,20 8.75,20 11.25,20 18.75,20 23.75,20 26.25,20 28.75,20 -20,22.5 -17.5,22.5 -15,22.5 -12.5,22.5 -10,22.5 -7.5,22.5 20,22.5 3.2,23.2 2.4,23.8 -18.75,25 -16.25,25 -13.75,25 -11.25,25 -8.75,25 -6.25,25 13.75,25 18.75,25 -20,27.5 -17.5,27.5 -15,27.5 -12.5,27.5 -10,27.5 -7.5,27.5 0,27.5 2.5,27.5 7.5,27.5 10,27.5 15,27.5 17.5,27.5 20,27.5
  other v3: 13.55,-21.977 4.2,25.54
NetC4_2: C4.2 Q1.4 TP11.1 | length 2.9
  Top Layer w0.35: Q1.4 0.924,-18.124 1.5,-18.7 1.915,-19.115 2.275,-19.115 2.5,-19.34 C4.2
NetC5_1: C5.1 Q1.11 TP10.1 | length 4.6
  Top Layer w0.35: TP10.1 -5.4,-16.751 -4.825,-16.176 -3,-16.176 Q1.11
NetC5_2: C5.2 Q1.13 R2.2 TP9.1 | length 4.1
  Top Layer w0.5: C5.2@-3,-17.9 -2.925,-17.9 -2.506,-17.481 -1.681,-17.481 Q1.13 ; Q1.13 -1.45,-17.601 -1.45,-18.723 ; TP9.1 R2.2
NetD1_5: D1.5 D2.2 | length 3.6
  Top Layer w0.4: D1.5 D2.2
NetD1_6: D1.6 D2.1 | length 3.6
  Top Layer w0.4: D1.6 -14.3,8.6 D2.1@-14.2,8.5
NetD2_5: D2.5 D3.2 | length 3.6
  Top Layer w0.4: D2.5 D3.2
NetD2_6: D2.6 D3.1 | length 3.5
  Top Layer w0.4: D2.6 D3.1@-6.3,8.6
NetD4_5: D4.5 D5.2 | length 3.6
  Top Layer w0.4: D4.5 D5.2
NetD4_6: D4.6 D5.1 | length 3.5
  Top Layer w0.4: D4.6 D5.1@9.7,8.6
NetD5_5: D5.5 D6.2 | length 3.6
  Top Layer w0.4: D5.5 D6.2
NetD5_6: D5.6 D6.1 | length 3.5
  Top Layer w0.4: D5.6 D6.1@17.7,8.6
NetL1_1: L1.1 Q1.9 TP12.1 | length 2
  Top Layer w1.1: L1.1@-2.02,-8.235 -2.02,-7.665 L1.1
NetQ1_6: Q1.6 R1.2 | length 3.3
  Top Layer w0.35: Q1.6 2.371,-16.326 2.547,-16.502 3.653,-16.502 3.855,-16.3 R1.2
NetQ1_12: Q1.12 R2.1 | length 5
  Top Layer w0.35: R2.1@-2.9,-19.3 -3.9,-18.3 -3.9,-17.2 -3.602,-16.902 -2.447,-16.902 -2.221,-16.676 Q1.12
PWM0A/SWCLK: J1.3 Q1.1 TP4.1 | length 85.6
  Top Layer w0.2: Q1.1 -0.587,-17.412 -0.587,-19.139 -0.587,-20.527 1.363,-22.477 13.787,-22.477 20.96,-15.304 20.96,15.84 16,20.8 ; J1.3 0.825,25.25 1.615,26.04 10.76,26.04 16,20.8 ; TP4.1 16,20.8
PWM0B/SWDIO: J1.1 Q1.2 TP6.1 | length 82.8
  Top Layer w0.2: Q1.2 -0.076,-19.624 1.8,-21.5 13.4,-21.5 19.996,-14.904 19.996,15.404 10.354,25.046 6.993,25.046 6.986,25.04 3.335,25.04 J1.1 3.325,24.175 4.1,23.4 TP6.1@8.1,23.4
SDI: D1.1 J8.2 TP14.1 | length 3.9
  Top Layer w0.4: J8.2 -24.275,7.625 -23.3,8.6 D1.1
SDIO: D3.6 D4.1 | length 3.5
  Top Layer w0.4: D3.6 D4.1@1.7,8.6
SDO: D6.6 J9.3 TP16.1 | length 3.9
  Top Layer w0.4: D6.6 23.5,8.6 24.475,7.625 J9.3
UART_LED/FET_EN: J1.4 Q1.3 R3.2 TP3.1 | length 76.4
  Top Layer w0.2: J1.4 -0.425,24.85 -0.125,24.55 0.825,23.6 0.975,23.6 2.6,21.975 2.6,21.95 3.25,21.3 12.718,21.3 19.023,14.995 19.023,-14.495 12.995,-20.523 2.302,-20.523 0.424,-18.645 Q1.3
VIN: C6.1 C8.1 C10.1 C12.1 J6.1 Q1.10 TP8.1 | length 8.5
  Top Layer w1.1: TP8.1 -11.3,-0.3 -8.925,-0.3 -8.9,-0.325 C10.1 -8.925,-0.425 -8.925,-6.125 J6.1
VOUT: C7.1 C9.1 C11.1 C13.1 J4.1 L1.2 TP7.1 | length 8.5
  Top Layer w1.1: J4.1 8.925,-6.125 8.925,-0.425 C11.1 8.9,-0.325 8.925,-0.3 11.3,-0.3 TP7.1
pads on no net: B1.1 J2. J3. J4. J5. J6. J7. Q1.
copper on no net:
  other v2: -25,-27.9 25,-27.9 -27.051,-27.051 -22.949,-27.051 22.949,-27.051 27.051,-27.051 -27.9,-25 -22.1,-25 22.1,-25 27.9,-25 -27.051,-22.949 -22.949,-22.949 22.949,-22.949 27.051,-22.949 -25,-22.1 25,-22.1 -25,22.1 25,22.1 -27.051,22.949 -22.949,22.949 22.949,22.949 27.051,22.949 -27.9,25 -22.1,25 22.1,25 27.9,25 -27.051,27.051 -22.949,27.051 22.949,27.051 27.051,27.051 -25,27.9 25,27.9

## Polygon pours and split planes (outlines as drawn)
GND on Top Layer "GND_L01_P001" (solid, pour order 1): -29.9,29.8 -29.9,-30.2 30.1,-30.2 30.1,29.8
GND on Bottom Layer "GND_L02_P000" (solid, pour order 0): -29.9,29.8 -29.9,-30.2 30.1,-30.2 30.1,29.8

## Other copper
Top Layer:
  rectangle net GND: 7.2,-15 10.8,-13
  rectangle net GND: -10.8,-15 -7.2,-13
  rectangle net VIN: -5.9,-7.4 -4.1,-5.2
  rectangle net VOUT: 1.575,-8.925 9.225,-3.475
  region net VIN: -0.7,-15.526 -0.7,-12.2 -2.925,-9.975 -2.925,-8.125 -7.925,-3.125 -9.6,-3.125 -10.525,-4.05 -10.525,-8.175 -9,-9.7 -7.875,-9.7 -6.175,-11.4 -2.075,-15.5
  region net NetL1_1: -0.525,-16.125 0.525,-16.125 0.55,-16.1 0.55,-12.15 1.125,-11.575 1.125,-6.025 -1.4,-3.5 -2.6,-3.5 -2.725,-3.625 -2.725,-9.975 -0.55,-12.15 -0.55,-16.1
Bottom Layer:
  rectangle net GND: -10.8,-15 -7.2,-13
  rectangle net GND: 7.2,-15 10.8,-13

## Silkscreen, mask and mechanical layers (free items; w line width, h text height)
Top Overlay:
  text "PB" at 12.815,19.671 h2 r315
  text "PA" at 6.634,19.3 h2
  text "EN" at 2.234,17.2 h2
  text "GND" at -6.466,11.1 h2
  text "VI:<80V / HS:6.6mR / LS:6.6mR" at -22.375,4.525 h1.75
  text "VO" at 13.534,-1.1 h2
  text "VI" at -16.333,-1.2 h2
  text "SW" at -7.166,-21.4 h2
Bottom Overlay:
  text "TS3" at 20.713,5.632 h8 r315
  text "EE Senior Design / Winter 2023 / SMPS Core" at 12.3,3.8 h2
Top Solder:
  lines w0.4: -6.75,16.172 -6.75,14.972 ; -6.75,14.972 -5.85,14.972 -6.75,14.072 -7.65,14.972 -6.75,14.972
  text "TS3" at -21.291,-21.673 h3